# Altium PCB DAP-PCB.PcbDoc (part 2 of 5)
Units mm, origin at the board's own origin, x right, y up, seen from the top; angles counter-clockwise.
Board outline 54.75 x 54.75 mm, 6 copper layers (L1 (SIG/PWR), L2 (GND), L3 (SIG), L4 (PWR), L5 (GND), L6 (SIG/PWR)), stack 1.65 mm thick; 270 components, 172 nets, 891 pads, 308 vias.
Unrouted connection lines stored in the file: 5.
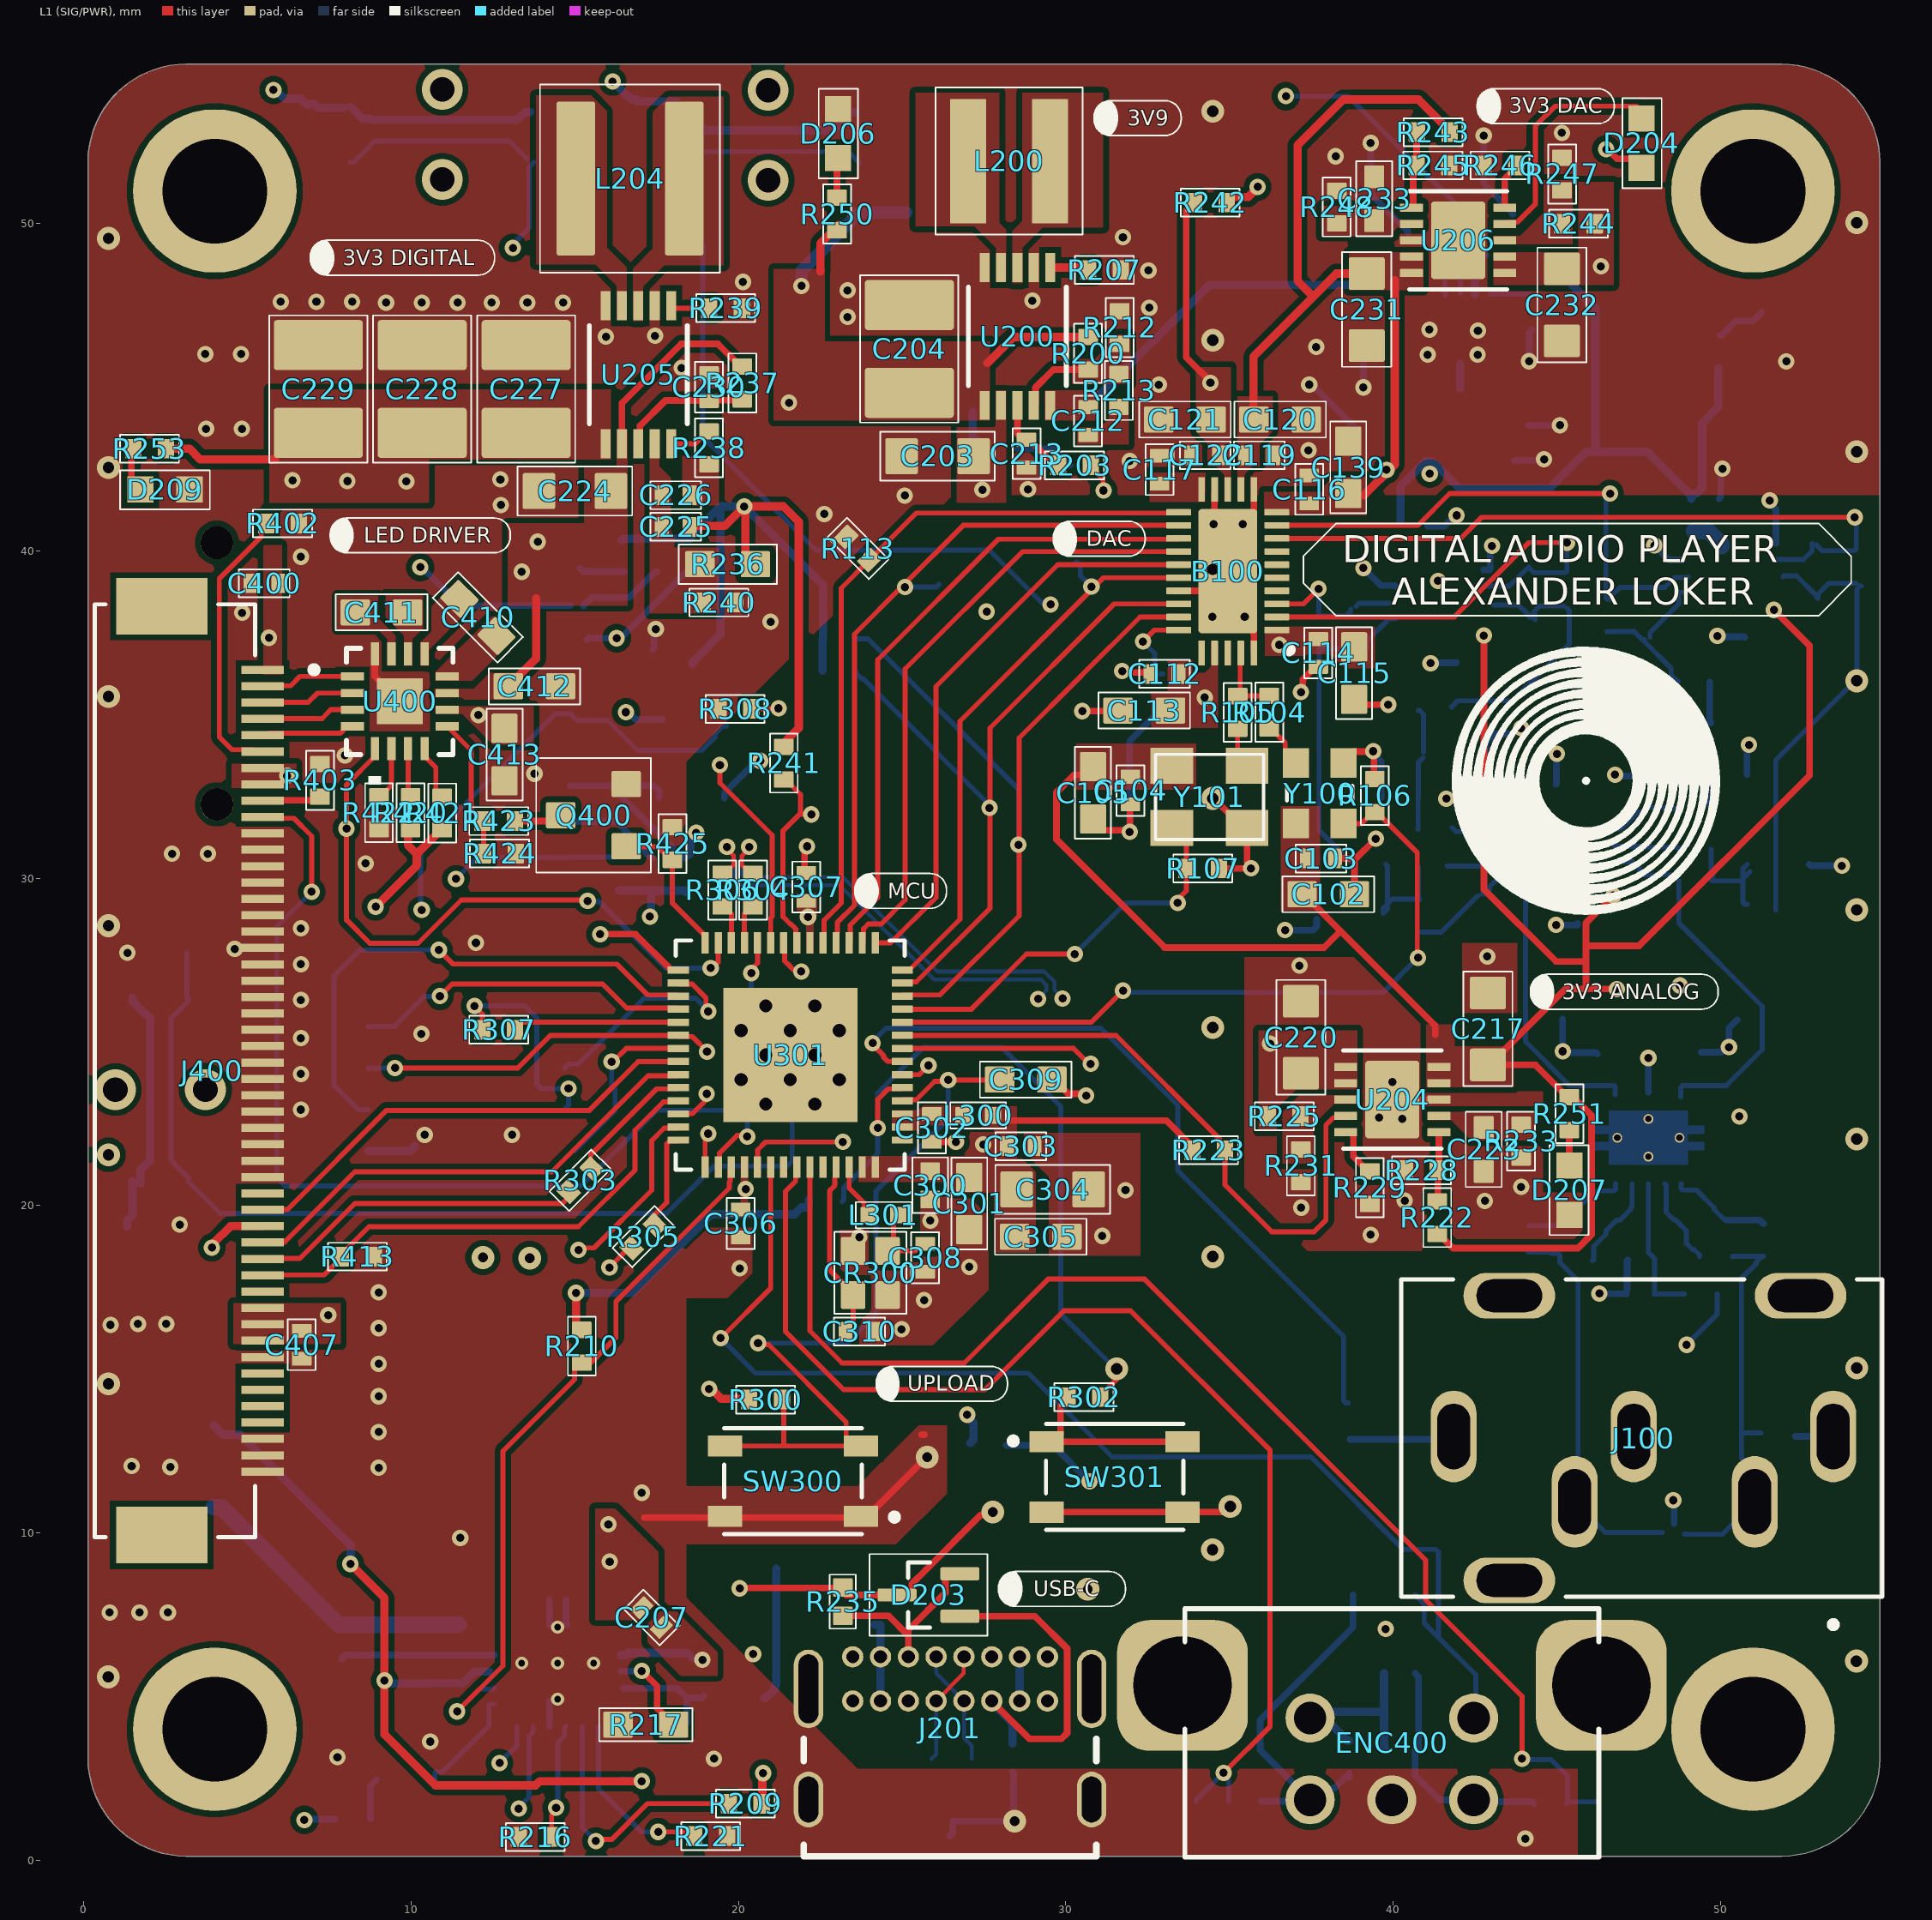
[diagram p0: L1 (SIG/PWR) view]

## Part data (continued)
D201: library part #1-049, <Rating>=7.78V(Bd), <Value>=12V(Cl), Manufacturer 1="Diodes Incorporated", Manufacturer Part Number 1=SMAJ7.0A-13-F, Supplier Part Number 1=SMAJ7.0A-FDICT-ND, <Spec>=7V(Rv), <Termination>=SMD, AL-PN=#1-049, Creator Project=aRTy, Lead Time="12 Weeks", PartType=Diode, Status=Verified, SubType=TVS, Supplier 1=Digikey, Supplier Label="12V Clamp 33.3A Ipp Tvs Diode Surface Mount SMA", Type=Standard
D202 D203: library part #1-099, <Rating>=1.5pF, <Value>=12.4V(Cl), Manufacturer 1="Texas Instruments", Manufacturer Part Number 1=TPD2E2U06QDCKRQ1, Supplier Part Number 1=296-44302-1-ND, <Spec>=20kV, <Termination>=SMD, AL-PN=#1-099, Creator Project=DAP, Lead Time="9 Weeks", PartType=Diode, Status=Verified, SubType=TVS, Supplier 1=Digikey, Supplier Label="12.4V (Typ) Clamp 5.5A (8/20µs) Ipp Tvs Diode Surface Mount SC-70-3", Type=Standard
D400 D401: library part #1-127, <Rating>=12A, <Value>=5V(RWM), Manufacturer 1="Good-Ark Semiconductor", Manufacturer Part Number 1=GSER5U007, Supplier Part Number 1=4786-GSER5U007CT-ND, <Termination>=SMD, AL-PN=#1-127, Creator Project=DAP, Lead Time="16 Weeks", PartType=Diode, Status=Verified, SubType=TVS, Supplier 1=Digikey, Supplier Label="25V Clamp 12A (8/20µs) Ipp Tvs Diode Surface Mount SOT-23-6L", Type=Standard
ENC400: library part #1-135, Manufacturer 1="TT Electronics", Manufacturer Part Number 1=EN12-VS11AF18, Supplier Part Number 1=987-1198-ND, <Termination>=Thru, AL-PN=#1-135, Creator Project=DAP, Lead Time="34 Weeks", PartType=Encoder, Status=Verified, SubType=Quadrature, Supplier 1=Digikey, Supplier Label="Rotary Encoder Mechanical 12 Quadrature (Incremental) Right Angle", Type=Standard
FB200: library part #1-068, <Rating>=3A, <Value>=120Ohm, Manufacturer 1="Würth Elektronik", Manufacturer Part Number 1=742792023, Supplier Part Number 1=732-1613-1-ND, <Footprint>=0805, <Termination>=SMD, AL-PN=#1-068, Creator Project=DAP, Lead Time="33 Weeks", PartType=Misc, Status=Verified, SubType="Ferrite Bead", Supplier 1=Digikey, Supplier Label="120 Ohms @ 100 MHz 1 Signal Line Ferrite Bead 0805 (2012 Metric) 3A 30mOhm", Type=Standard
J100: library part #1-111, <Value>=3.5mm, Manufacturer 1="Same Sky", Manufacturer Part Number 1=SJ1-3535NS, Package=None, Supplier Part Number 1=CP1-3535NS-ND, <Termination>=Thru, AL-PN=#1-111, Check_prices=https://www.snapeda.com/parts/SJ1-3535NS/Same+Sky/view-part/?ref=eda, Creator Project=DAP, Lead Time="19 Weeks", MF="Same Sky", MP=SJ1-3535NS, PartType=Connector, SnapEDA_Link=https://www.snapeda.com/parts/SJ1-3535NS/Same+Sky/view-part/?ref=snap, Status=Verified, SubType=Audio, Supplier 1=Digikey, Supplier Label="3.50mm (0.141\", 1/8\", Mini Plug) - Headphone Phone Jack Stereo (3 Conductor, TRS) Connector Solder", Type=Standard
J200: library part #1-137, <Value>=3x1, Manufacturer 1=Molex, Manufacturer Part Number 1=5055670381, Package=None, Supplier Part Number 1=WM22227CT-ND, <Termination>=SMD, AL-PN=#1-137, Availability=Unavailable, Creator Project=DAP, Lead Time="19 Weeks", MF="{'manufacturer': u'Molex'}", MP=436500329, PartType=Connector, Price=None, Status=Verified, SubType=Header, Supplier 1=Digikey, Supplier Label="Connector Header Surface Mount, Right Angle 3 position 0.049\" (1.25mm)", Type=Standard
J201: library part #1-069, <Rating>=5A, <Value>=48V, Manufacturer 1=GCT, Manufacturer Part Number 1=USB4085-GF-A, Package=None, Supplier Part Number 1=2073-USB4085-GF-ACT-ND, <Spec>=USB-C, <Termination>=Thru, AL-PN=#1-069, Availability="In Stock", Check_prices=https://www.snapeda.com/parts/USB4085-GF-A/Global+Connector+Technology/view-part/?ref=eda, Creator Project=DAP, Lead Time="7 Weeks", MF="Global Connector Technology", MP=USB4085-GF-A, PartType=Connector, Price=None, Purchase-URL=https://pricing.snapeda.com/search/part/USB4085-GF-A/?ref=eda, SnapEDA_Link=https://www.snapeda.com/parts/USB4085-GF-A/Global+Connector+Technology/view-part/?ref=snap, Status=Verified, SubType=USB, Supplier 1=Digikey, Supplier Label="USB-C (USB TYPE-C) USB 2.0 Receptacle Connector 24 (16+8 Dummy) Position Through Hole, Right Angle", Type=Standard